# Altium PCB Heart-by-LED.PcbDoc
Units mm, origin at the board's own origin, x right, y up, seen from the top; angles counter-clockwise.
Board outline 98 x 98 mm, 4 copper layers (Top Copper, Signal Layer 1, Signal Layer 2, Bottom Copper), stack 0.77 mm thick; 128 components, 108 nets, 411 pads, 0 vias.
Unrouted connection lines stored in the file: 271.
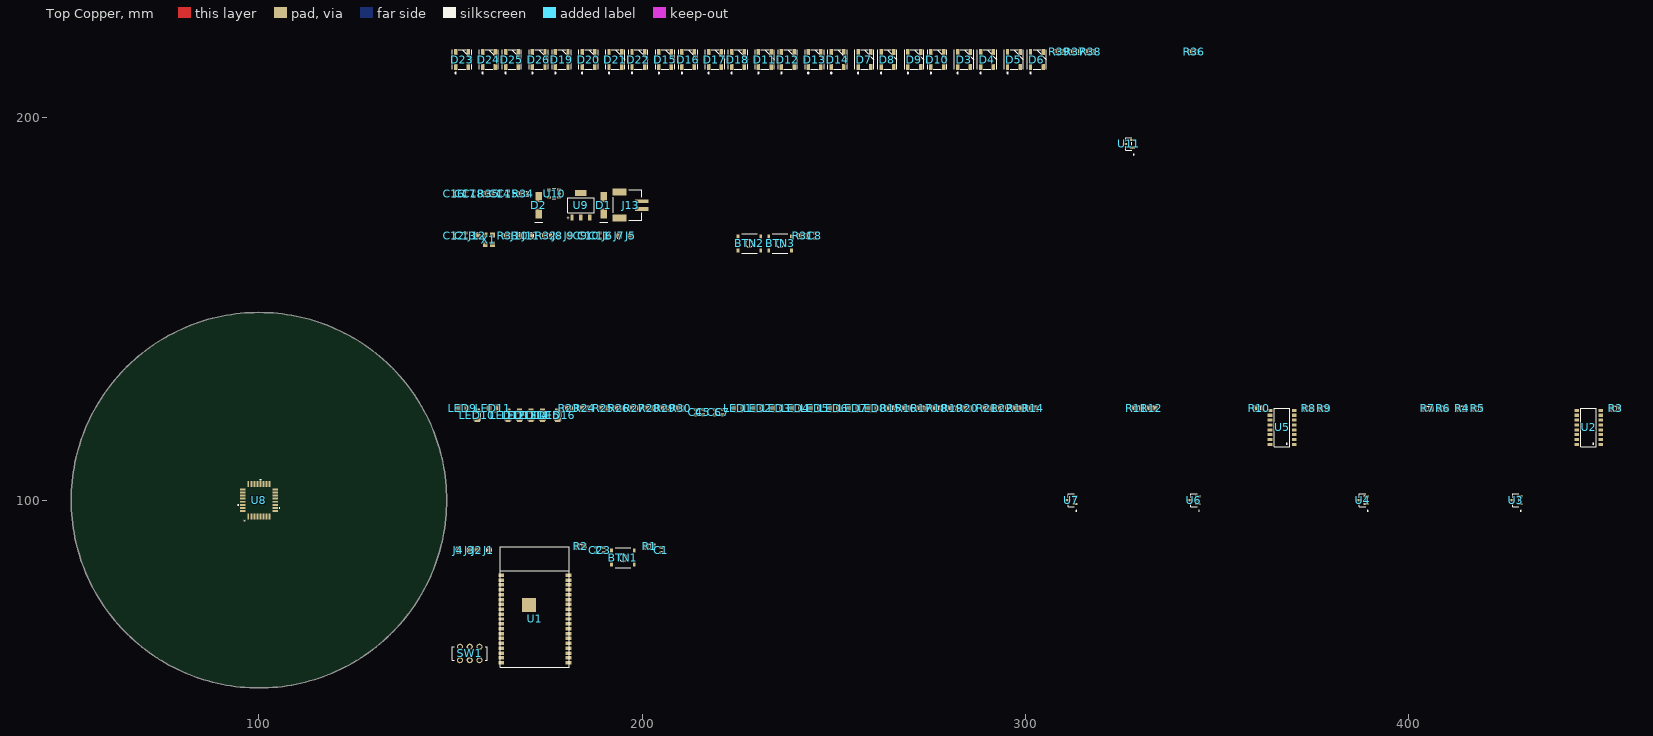
[diagram p0: Top Copper view]
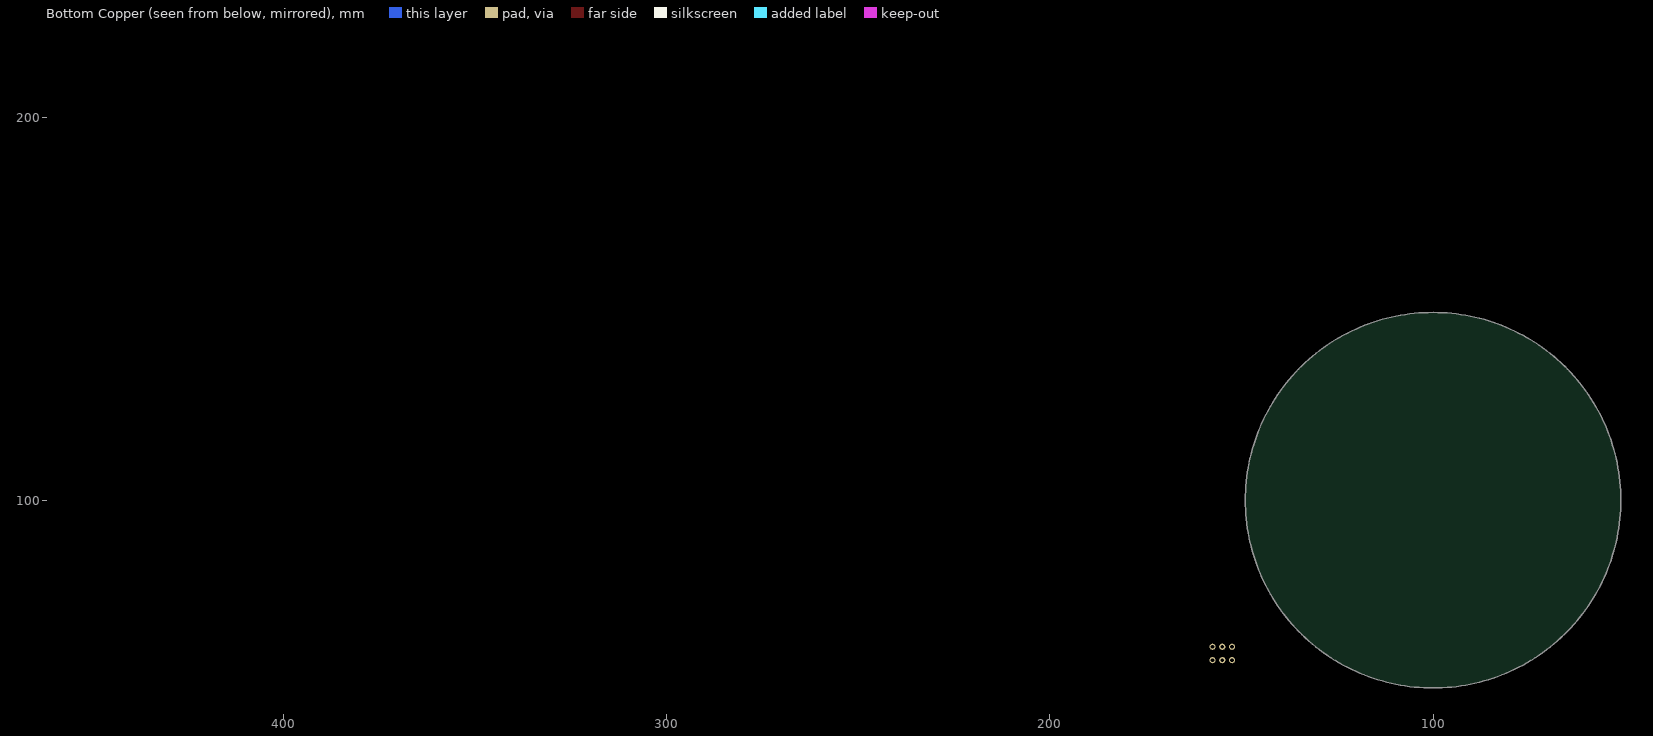
[diagram p1: Bottom Copper view, seen from below]

## Layer stack, top to bottom
Top Mask: solder mask 0.015, Solder Resist, Dk 3.8
Top Copper: signal copper 0.035
Dielectric 1: prepreg 0.2, 7628, Dk 4.6
Signal Layer 1: signal copper 0.0175
Core: core 0.265, FR-4, Dk 4.5
Signal Layer 2: signal copper 0.0175
Dielectric 2: prepreg 0.2, 7628, Dk 4.6
Bottom Copper: signal copper 0.035
Bottom Mask: solder mask 0.015, Solder Resist, Dk 3.8

## Board outline
100,51 cw(c100,100) 51,100 cw(c100,100) 100,149 cw(c100,100) 149,100 cw(c100,100)

## Design rules (kind name [scope] priority, off if disabled: settings)
Clearance [All] p1: gap=0.254 ignorepadtopadclearanceinfootprint=FALSE except(0: Arc-Hole Track-Hole SMDPad-Hole THPad-Hole Via-Hole Fill-Hole Poly-Hole Region-Hole Text-Hole)
PolygonConnect [All] p1: connectstyle=Relief reliefconductorwidth=0.254 reliefentries=4 polygonreliefangle="90 Angle" airgapwidth=0.254
RoutingVias [All] p1: holewidth=0.711 width=1.27 viastyle="Through Hole" minholewidth=0.711 minwidth=1.27 maxholewidth=0.711 maxwidth=1.27
SolderMaskExpansion [All] p1: expansion=0.102
Width [All] p1: maxlimit=0.254 minlimit=0.254 preferedwidth=0.254
30 further rules are at their usual default settings.

## Classes and differential pairs
component class Power: C14 C15 C16 C17 C18 D1 D2 J13 R34 R35 SW1 U9 U10
component class WS2812B: D3 D4 D5 D6 D7 D8 D9 D10 D11 D12 D13 D14 D15 D16 D17 D18 D19 D20 D21 D22 D23 D24 D25 D26 R36 R37 R38 R39 U11
component class MCU: BTN2 BTN3 C8 C9 C10 C11 C12 C13 J5 J6 J7 J8 J9 J10 J11 J12 R31 R32 R33 U8 X1
component class LEDs: C4 C5 C6 C7 LED1 LED2 LED3 LED4 LED5 LED6 LED7 LED8 LED9 LED10 LED11 LED12 LED13 LED14 LED15 LED16 R3 R4 R5 R6 R7 R8 R9 R10 R11 R12 R13 R14 R15 R16 R17 R18 R19 R20 R21 R22 R23 R24 R25 R26 R27 R28 R29 R30 U2 U3 U4 U5 U6 U7
component class ESP32: BTN1 C1 C2 C3 J1 J2 J3 J4 R1 R2 U1

## Components (designator, comment, footprint, x,y, rotation, side; value= is the part's Value field where it differs from the comment)
BTN1 "Button" TactileButton_4x4 195,85 r0 top
BTN2 "Button" TactileButton_4x4 228,167 r0 top
BTN3 "Button" TactileButton_4x4 236,167 r0 top
C1 "Cap Semi" 1608[0603] 205,87 r90 top value=100nF
C2 "Cap Semi" 1608[0603] 188,87 r90 top value=100nF
C3 "Cap Semi" 1608[0603] 190,87 r90 top value=1uF
C4 "Cap Semi" 1608[0603] 214,123 r90 top value=100nF
C5 "Cap Semi" 1608[0603] 216,123 r90 top value=100nF
C6 "Cap Semi" 1608[0603] 219,123 r90 top value=1uF
C7 "Cap Semi" 1608[0603] 221,123 r90 top value=1uF
C8 "Cap Semi" 1608[0603] 245,169 r90 top value=100nF
C9 "Cap Semi" 1608[0603] 184,169 r90 top value=100nF
C10 "Cap Semi" 1608[0603] 186,169 r90 top value=1uF
C11 "Cap Semi" 1608[0603] 189,169 r90 top value=100nF
C12 "Cap Semi" 1608[0603] 151,169 r90 top value=22pF
C13 "Cap Semi" 1608[0603] 154,169 r90 top value=22pF
C14 "Cap Semi" 1608[0603] 163,180 r90 top value=1uF
C15 "Cap Semi" 1608[0603] 165,180 r90 top value=100nF
C16 "Cap Semi" 1608[0603] 151,180 r90 top value=1uF
C17 "Cap Semi" 1608[0603] 154,180 r90 top value=22pF
C18 "Cap Semi" 1608[0603] 156,180 r90 top value=100nF
D1 "Diode Schottky" DO-214AC 190,177 r90 top value="SS54 SMA"
D2 "Diode Schottky" DO-214AC 173,177 r90 top value="SS54 SMA"
D3 "RGB LED" WS2812B 284,215 r90 top value=WS2812B
D4 "RGB LED" WS2812B 290,215 r90 top value=WS2812B
D5 "RGB LED" WS2812B 297,215 r90 top value=WS2812B
D6 "RGB LED" WS2812B 303,215 r90 top value=WS2812B
D7 "RGB LED" WS2812B 258,215 r90 top value=WS2812B
D8 "RGB LED" WS2812B 264,215 r90 top value=WS2812B
D9 "RGB LED" WS2812B 271,215 r90 top value=WS2812B
D10 "RGB LED" WS2812B 277,215 r90 top value=WS2812B
D11 "RGB LED" WS2812B 232,215 r90 top value=WS2812B
D12 "RGB LED" WS2812B 238,215 r90 top value=WS2812B
D13 "RGB LED" WS2812B 245,215 r90 top value=WS2812B
D14 "RGB LED" WS2812B 251,215 r90 top value=WS2812B
D15 "RGB LED" WS2812B 206,215 r90 top value=WS2812B
D16 "RGB LED" WS2812B 212,215 r90 top value=WS2812B
D17 "RGB LED" WS2812B 219,215 r90 top value=WS2812B
D18 "RGB LED" WS2812B 225,215 r90 top value=WS2812B
D19 "RGB LED" WS2812B 179,215 r90 top value=WS2812B
D20 "RGB LED" WS2812B 186,215 r90 top value=WS2812B
D21 "RGB LED" WS2812B 193,215 r90 top value=WS2812B
D22 "RGB LED" WS2812B 199,215 r90 top value=WS2812B
D23 "RGB LED" WS2812B 153,215 r90 top value=WS2812B
D24 "RGB LED" WS2812B 160,215 r90 top value=WS2812B
D25 "RGB LED" WS2812B 166,215 r90 top value=WS2812B
D26 "RGB LED" WS2812B 173,215 r90 top value=WS2812B
J1 "TestPin" TestPin_1mm 160,87 r90 top
J2 "TestPin" TestPin_1mm 157,87 r90 top
J3 "TestPin" TestPin_1mm 155,87 r90 top
J4 "TestPin" TestPin_1mm 152,87 r90 top
J5 "TestPin" TestPin_1mm 197,169 r90 top
J6 "TestPin" TestPin_1mm 191,169 r90 top
J7 "TestPin" TestPin_1mm 194,169 r90 top
J8 "TestPin" TestPin_1mm 178,169 r90 top
J9 "TestPin" TestPin_1mm 181,169 r90 top
J10 "TestPin" TestPin_1mm 168,169 r90 top
J11 "TestPin" TestPin_1mm 171,169 r90 top
J12 "TestPin" TestPin_1mm 157,169 r90 top
J13 "PH2.0 Female" "PH2.0 FEMALE" 197,177 r90 top
LED1 "LED" LED-0805-Red 224,124 r0 top value="LED 3 - 5 ly 2 Colour"
LED2 "LED" LED-0805-Red 229,124 r0 top value="LED 3 - 5 ly 2 Colour"
LED3 "LED" LED-0805-Red 234,124 r0 top value="LED 3 - 5 ly 2 Colour"
LED4 "LED" LED-0805-Red 239,124 r0 top value="LED 3 - 5 ly 2 Colour"
LED5 "LED" LED-0805-Red 244,124 r0 top value="LED 3 - 5 ly 2 Colour"
LED6 "LED" LED-0805-Red 249,124 r0 top value="LED 3 - 5 ly 2 Colour"
LED7 "LED" LED-0805-Red 254,124 r0 top value="LED 3 - 5 ly 2 Colour"
LED8 "LED" LED-0805-Red 259,124 r0 top value="LED 3 - 5 ly 2 Colour"
LED9 "LED" LED-0805-Red 152,124 r0 top value="LED 3 - 5 ly 2 Colour"
LED10 "LED" LED-0805-Red 157,121 r90 top value="LED 3 - 5 ly 2 Colour"
LED11 "LED" LED-0805-Red 160,124 r0 top value="LED 3 - 5 ly 2 Colour"
LED12 "LED" LED-0805-Red 165,121 r90 top value="LED 3 - 5 ly 2 Colour"
LED13 "LED" LED-0805-Red 168,121 r90 top value="LED 3 - 5 ly 2 Colour"
LED14 "LED" LED-0805-Red 171,121 r90 top value="LED 3 - 5 ly 2 Colour"
LED15 "LED" LED-0805-Red 174,121 r90 top value="LED 3 - 5 ly 2 Colour"
LED16 "LED" LED-0805-Red 178,121 r90 top value="LED 3 - 5 ly 2 Colour"
R1 "Res" RES-SMD-0603 202,88 r0 top value=0R
R2 "Res" RES-SMD-0603 184,88 r0 top value=0R
R3 "Res" RES-SMD-0603 454,124 r0 top value=0R
R4 "Res" RES-SMD-0603 414,124 r0 top value=10k
R5 "Res" RES-SMD-0603 418,124 r0 top value=10k
R6 "Res" RES-SMD-0603 409,124 r0 top value=0R
R7 "Res" RES-SMD-0603 405,124 r0 top value=0R
R8 "Res" RES-SMD-0603 374,124 r0 top value=10k
R9 "Res" RES-SMD-0603 378,124 r0 top value=10k
R10 "Res" RES-SMD-0603 361,124 r0 top value=0R
R11 "Res" RES-SMD-0603 329,124 r0 top value=10k
R12 "Res" RES-SMD-0603 333,124 r0 top value=10k
R13 "Res" RES-SMD-0603 298,124 r0 top value=10k
R14 "Res" RES-SMD-0603 302,124 r0 top value=10k
R15 "Res" RES-SMD-0603 265,124 r0 top value=10k
R16 "Res" RES-SMD-0603 269,124 r0 top value=10k
R17 "Res" RES-SMD-0603 273,124 r0 top value=10k
R18 "Res" RES-SMD-0603 277,124 r0 top value=10k
R19 "Res" RES-SMD-0603 281,124 r0 top value=10k
R20 "Res" RES-SMD-0603 285,124 r0 top value=10k
R21 "Res" RES-SMD-0603 290,124 r0 top value=10k
R22 "Res" RES-SMD-0603 294,124 r0 top value=10k
R23 "Res" RES-SMD-0603 181,124 r0 top value=10k
R24 "Res" RES-SMD-0603 185,124 r0 top value=10k
R25 "Res" RES-SMD-0603 190,124 r0 top value=10k
R26 "Res" RES-SMD-0603 194,124 r0 top value=10k
R27 "Res" RES-SMD-0603 198,124 r0 top value=10k
R28 "Res" RES-SMD-0603 202,124 r0 top value=10k
R29 "Res" RES-SMD-0603 206,124 r0 top value=10k
R30 "Res" RES-SMD-0603 210,124 r0 top value=10k
R31 "Res" RES-SMD-0603 242,169 r0 top value=10k
R32 "Res" RES-SMD-0603 175,169 r0 top value=1k
R33 "Res" RES-SMD-0603 165,169 r0 top value=1k
R34 "Res" RES-SMD-0603 169,180 r0 top value=0R
R35 "Res" RES-SMD-0603 160,180 r0 top value=100k
R36 "Res" RES-SMD-0603 344,217 r0 top value=0R
R37 "Res" RES-SMD-0603 313,217 r0 top value=10k
R38 "Res" RES-SMD-0603 317,217 r0 top value=10k
R39 "Res" RES-SMD-0603 309,217 r0 top value=0R
SW1 "Switch" MSS-22D18 155,60 r0 top
U1 "ESP32 Module" ESP32-WROVER-IB 172,69 r0 top value=ESP32-WROVER-IB
U2 "Shift Register" SO16 447,119 r90 top value=74HC595D
U3 "BSS138LT1G" SOT23-3_ONS 428,100 r90 top
U4 "BSS138LT1G" SOT23-3_ONS 388,100 r90 top
U5 "Shift Register" SO16 367,119 r90 top value=74HC595D
U6 "BSS138LT1G" SOT23-3_ONS 344,100 r90 top
U7 "BSS138LT1G" SOT23-3_ONS 312,100 r90 top
U8 "ATMEGA328P-AU" 32A_ATM 100,100 r90 top locked
U9 "lm1117mpx-5_0" LM1117 184,177 r90 top value=Value
U10 "LDO 3.3V" SOT-23-5 177,180 r90 top
U11 "BSS138LT1G" SOT23-3_ONS 327,193 r90 top
X1 "Crystal" SMD-3225-4P 160,168 r90 top value=16MHz

## Footprints (in the part's own frame and the unit in brackets; to place one, negate y for a bottom-side part, rotate by r counter-clockwise, add the part's x,y. Pads: shape width x height; smd on the part's side, far side on the other; paste and mask are expansions set on the pad)
32A_ATM [mil]
  rect 58x20 smd paste+0 mask+0: 1(-167,110.24) 2(-167,78.74) 3(-167,47.24) 4(-167,15.75) 5(-167,-15.75) 6(-167,-47.24) 7(-167,-78.74) 8(-167,-110.24) 17(167,-110.24) 18(167,-78.74) 19(167,-47.24) 20(167,-15.75) 21(167,15.75) 22(167,47.24) 23(167,78.74) 24(167,110.24)
  rect 20x58 smd paste+0 mask+0: 9(-110.24,-167) 10(-78.74,-167) 11(-47.24,-167) 12(-15.75,-167) 13(15.75,-167) 14(47.24,-167) 15(78.74,-167) 16(110.24,-167) 25(110.24,167) 26(78.74,167) 27(47.24,167) 28(15.75,167) 29(-15.75,167) 30(-47.24,167) 31(-78.74,167) 32(-110.24,167)
  silkscreen extent -86,-216 216,216, body extent -182,-182 182,182, height 47
1608[0603] [mm] "Chip Capacitor, Body 1.6x0.8mm, IPC High Density"
  rect 0.8x0.9 smd: 1(-0.7,0) 2(0.7,0)
  body extent -0.87,-0.48 0.87,0.48, height 1.3
DO-214AC [mm]
  rect 2.65x1.75 smd: 1(-2.15,0) 2(2.15,0)
  silkscreen extent -4.5,-1 -4.5,1, body extent -2.6,-1.3 2.6,1.3, height 2.4
ESP32-WROVER-IB [mm] "Multiprotocol Modules SMD Module M213DH3264UH3Q0, ESP32-D0WD, 64Mbits PSRAM, 4 MB SPI flash, IPEX Antenna connector"
  rect 1.5x0.9 smd: 1(-8.75,11.43) 2(-8.75,10.16) 3(-8.75,8.89) 4(-8.75,7.62) 5(-8.75,6.35) 6(-8.75,5.08) 7(-8.75,3.81) 8(-8.75,2.54) 9(-8.75,1.27) 10(-8.75,0) 11(-8.75,-1.27) 12(-8.75,-2.54) 13(-8.75,-3.81) 14(-8.75,-5.08) 15(-8.75,-6.35) 16(-8.75,-7.62) 17(-8.75,-8.89) 18(-8.75,-10.16) 19(-8.75,-11.43) 20(8.75,-11.43) 21(8.75,-10.16) 22(8.75,-8.89) 23(8.75,-7.62) 24(8.75,-6.35) 25(8.75,-5.08) 26(8.75,-3.81) 27(8.75,-2.54) 28(8.75,-1.27) 29(8.75,0) 30(8.75,1.27) 31(8.75,2.54) 32(8.75,3.81) 33(8.75,5.08) 34(8.75,6.35) 35(8.75,7.62) 36(8.75,8.89) 37(8.75,10.16) 38(8.75,11.43)
  rect 3.7x3.7 smd: 39(-1.5,3.63)
  silkscreen extent -9,-12.53 9,18.87
LED-0805-Red [mil]
  rect 50x55 smd: 1(0,0) 2(90,0)
  silkscreen extent 0,-35 90,35, body extent 5,-25 85,25, height 43
LM1117 [mil]
  rect 62.56x33.36 smd paste+0 mask+0: 1(-126,90.55) 2(-126,0) 3(-126,-90.55)
  rect 62.56x120.43 smd paste+0 mask+0: 4(126,0)
  silkscreen extent -78,-137 78,137, body extent -144,-132 144,132, height 71
MSS-22D18 [mm]
  round 1.6 hole 1: 1(-2.54,1.75) 2(0,1.75) 3(2.54,1.75) 4(-2.54,-1.75) 5(0,-1.75) 6(2.54,-1.75)
  silkscreen extent -4.55,-1.75 4.55,1.75
"PH2.0 FEMALE" [mm]
  rect 1x3.5 smd: 1(1,-2.876) 2(-1,-2.876)
  rect 1.8x3.6 smd: 3(-3.4,2.876) 4(3.4,2.876)
  silkscreen extent -4,-2.88 4,4.5
RES-SMD-0603 [mm]
  rect 0.6x0.9 smd: 1(-0.889,0) 2(0.927,0)
  silkscreen extent -1.4,-0.64 1.4,0.64, body extent -0.8,-0.4 0.8,0.4, height 0.43
SMD-3225-4P [mm]
  rect 1.4x1.2 smd: 1(-1.2,-0.95) 2(1.2,-0.95) 3(1.2,0.95) 4(-1.2,0.95)
  body extent -1.6,-1.25 1.6,1.25, height 0.81
SO16 [mm]
  rect 0.8x1.2 smd: 1(-4.445,-3.15) 2(-3.175,-3.15) 3(-1.905,-3.15) 4(-0.635,-3.15) 5(0.635,-3.15) 6(1.905,-3.15) 7(3.175,-3.15) 8(4.445,-3.15) 9(4.445,3.15) 10(3.175,3.15) 11(1.905,3.15) 12(0.635,3.15) 13(-0.635,3.15) 14(-1.905,3.15) 15(-3.175,3.15) 16(-4.445,3.15)
  silkscreen extent -5,-2 5,2, body extent -4.98,-3.07 4.99,3.07, height 1.73
SOT23-3_ONS [mil]
  rect 22x55 smd paste+0 mask+0: 1(-40,-38.5) 2(40,-38.5) 3(0,38.5)
  silkscreen extent -115,-57 65,33, body extent -60,-52 60,52, height 44
SOT-23-5 [mm]
  rect 0.7x1 smd: 1(-0.95,-1.3) 2(0,-1.3) 3(0.95,-1.3) 4(0.95,1.3) 5(-0.95,1.3)
  silkscreen extent -1.35,-0.5 1.35,0.5, body extent -1.5,-1.25 1.5,1.25, height 1.05
TactileButton_4x4 [mm] "Tactile Button 4mm x 4mm H=1.5mm SMD 4-Pin"
  rect 0.75x1.05 smd: 1(-2.95,1.825) 2(-2.95,-1.825) 3(2.95,-1.825) 4(2.95,1.825)
  silkscreen extent -2,-2.6 2,2.6
TestPin_1mm [mm]
  round 1 smd: 1(0,0)
  silkscreen extent -0.74,-0.74 0.74,0.74
WS2812B [mm] "RGB 620~630nm Red, 515~530nm Green, 465~475nm Blue SMD,5x5mm Light Emitting Diodes (LED) ROHS"
  rect 1.5x0.9 smd: 1(-1.95,1.65) 2(-1.95,-1.65) 3(1.95,-1.65) 4(1.95,1.65)
  silkscreen extent -3.7,-2.5 2.5,2.5

## Part data
BTN1 BTN2 BTN3: library part Tactile_4x4
C1 C2 C3 C4 C5 C6 C7 C8 C9 C10 C11 C12 C13 C14 C15 C16 C17 C18: "Capacitor (Semiconductor SIM Model)", LatestRevisionDate=29-May-2009, LatestRevisionNote="IPC-7351 Footprint Added.", PackageDescription="Chip Capacitor", PackageReference=C1206, Published=8-Jun-2000, Publisher="Altium Limited"
D1 D2: library part "SS54 SMA", "Diode Shotky SS54 5A 40V"
D3 D4 D5 D6 D7 D8 D9 D10 D11 D12 D13 D14 D15 D16 D17 D18 D19 D20 D21 D22 D23 D24 D25 D26: library part WS2812B, "RGB 620~630nm Red, 515~530nm Green, 465~475nm Blue SMD,5x5mm Light Emitting Diodes (LED) ROHS", Manufacturer=Worldsemi
J1 J2 J3 J4 J5 J6 J7 J8 J9 J10 J11 J12: library part TestPin_1mm, "Test conntact for pogo pins"
J13: library part PH2.0, "2 Header PH 0.079\"(2.00mm) Male Pin SMD,P=2mm Wire To Board / Wire To Wire Connector ROHS"
LED1 LED2 LED3 LED4 LED5 LED6 LED7 LED8 LED9 LED10 LED11 LED12 LED13 LED14 LED15 LED16: library part "LED SMD"
R1 R2 R3 R4 R5 R6 R7 R8 R9 R10 R11 R12 R13 R14 R15 R16 R17 R18 R19 R20 R21 R22 R23 R24 R25 R26 R27 R28 R29 R30 R31 R32 R33 R34 R35 R36 R37 R38 R39: library part Res-SMD, "Resistor", Manufacturer="Generic Components", Class=Passive, Published=08/06/2000, Publisher="Altium Hobart Technology Centre"
SW1: library part MSS-22D18, "Plugin,9.1x3.5mm Slide Switches ROHS"
U1: library part ESP32-WROVER-IB, "Multiprotocol Modules SMD Module M213DH3264UH3Q0, ESP32-D0WD, 64Mbits PSRAM, 4 MB SPI flash, IPEX Antenna connector", Manufacturer="Espressif Systems"
U2 U5: library part 74HC595, "74HC Shift Register SOIC-16_150mil Registers ROHS"
U3 U4 U6 U7 U8 U9 U11: "No Description Available", Copyright="Copyright (C) 2018 Accelerated Designs. All rights reserved", RefDes=RefDes, Type=DEV
  U3 U4 U6 U7 U11: Built_By=EMA_Jessica, Manufacturer_Part_Number=BSS138LT1G, SourceLibrary=ON_Semiconductor_2019-12-30, Vendor="ON Semiconductor"
  U8: Built_By=EMA_UL_Team, Manufacturer_Part_Number=ATMEGA328P-AU, SourceLibrary=Atmel_2011-04-02, Vendor=Atmel
  U9: Built_By=EMA_UL_Team, Manufacturer_Part_Number=lm1117mpx-5_0, Vendor="Texas Instruments"
U10: library part RT9193-33GB, "300mA Fixed 3.3V SOT-23-5 Linear Voltage Regulators (LDO) ROHS"
X1: library part "Crystal 3225", "16MHz ±25ppm SMD3225-4P Oscillators ROHS"

## Nets (pads, with @x,y where several pads share a name; then routed paths per layer and width w, separated by ;. In a path a pad name is that pad's centre, name@x,y a point inside that pad or via, vN(x,y) a via of type N, cw(c..) or ccw(c..) an arc to the next point about the centre after c; other vN are vias at no path point)
+3.3: C2.2 C3.2 C18.2 R5.1 R9.1 R12.1 R14.1 R38.1 U1.2 U3.1 U4.1 U6.1 U7.1 U10.5 U11.1
AD0: U8.23
AD1: U8.24
AD2: U8.25
AD3: U8.26
AD4: R1.2 U8.27
AD5: R2.2 U8.28
AD6: U8.19
AD7: U8.22
ESP_BOOT: J2.1 U1.25
ESP_EN: BTN1.1 C1.2 J1.1 U1.3
ESP_IO12: R5.2 U1.14 U3.2
ESP_IO14: R9.2 U1.13 U4.2
ESP_IO15: R38.2 U1.23 U11.2
ESP_IO22: R1.1 U1.36
ESP_IO23: R2.1 U1.37
ESP_IO26: R12.2 U1.11 U6.2
ESP_IO27: R14.2 U1.12 U7.2
ESP_LED_CTRL: R37.2 R39.2 U11.3
ESP_RXD: J4.1 U1.34
ESP_TXD: J3.1 U1.35
GND: BTN1.3 BTN2.3 BTN3.3 C1.1 C2.1 C3.1 C4.2 C5.2 C6.2 C7.2 C8.1 C9.1 C10.1 C11.1 C12.1 C13.1 C14.1 C15.1 C16.1 C17.1 C18.1 D3.3 D4.3 D5.3 D6.3 D7.3 D8.3 D9.3 D10.3 D11.3 D12.3 D13.3 D14.3 D15.3 D16.3 D17.3 D18.3 D19.3 D20.3 D21.3 D22.3 D23.3 D24.3 D25.3 D26.3 J12.1 J13.3 J13.4 R35.2 SW1.5 U1.1 U1.15 U1.38 U1.39 U2.8 U2.13 U5.8 U5.13 U8.3 U8.5 U8.21 U9.1 U9.4 U10.2 X1.2 X1.4
IO0: R32.2 U8.30
IO1: R33.2 U8.31
IO2: BTN3.1 C8.2 U8.32
IO3: U8.1
IO4: R36.2 U8.2
IO5: R6.2 U8.9
IO6: R7.2 U8.10
IO7: R3.2 U8.11
IO8: R10.2 U8.12
IO9: R34.2 U8.13
IO10: U8.14
IO11: J7.1 U8.15
IO12: J9.1 U8.16
IO13: J11.1 U8.17
LED0: LED1.2 U2.15
LED1: LED2.2 U2.1
LED2: LED3.2 U2.2
LED3: LED4.2 U2.3
LED4: LED5.2 U2.4
LED5: LED6.2 U2.5
LED6: LED7.2 U2.6
LED7: LED8.2 U2.7
LED8: LED9.2 U5.15
LED9: LED10.2 U5.1
LED10: LED11.2 U5.2
LED11: LED12.2 U5.3
LED12: LED13.2 U5.4
LED13: LED14.2 U5.5
LED14: LED15.2 U5.6
LED15: LED16.2 U5.7
LED_DIN_1: D6.4 R36.1 R39.1
LED_DIN_2: D3.2 D10.4
LED_DIN_3: D7.2 D14.4
LED_DIN_4: D11.2 D18.4
LED_DIN_5: C4.1 C5.1 C6.1 C7.1 C9.2 C10.2 C16.2 D2.1 D3.1 D4.1 D5.1 D6.1 D7.1 D8.1 D9.1 D10.1 D11.1 D12.1 D13.1 D14.1 D15.1 D15.2 D15.4 D16.1 D16.2 D16.4 D17.1 D17.2 D17.4 D18.1 D18.2 D19.1 D20.1 D21.1 D22.1 D22.4 D23.1 D24.1 D25.1 D26.1 J5.1 R4.1 R8.1 R11.1 R13.1 R15.1 R16.1 R17.1 R18.1 R19.1 R20.1 R21.1 R22.1 R23.1 R24.1 R25.1 R26.1 R27.1 R28.1 R29.1 R30.1 R31.1 R37.1 U2.16 U5.16 U8.4 U8.6 U8.18 U10.1
LED_DIN_6: D19.2 D26.4
LED_DOUT: D23.2
MCU_AREF: C11.2 U8.20
MCU_RST: BTN2.1 J6.1 R31.2 U8.29
NetC15_2: C15.2 D2.2 U9.2
NetC17_2: C17.2 U10.4
NetD1_1: D1.1 SW1.1
NetD1_2: D1.2 J13.2
NetD3_4: D3.4 D4.2
NetD4_4: D4.4 D5.2
NetD5_4: D5.4 D6.2
NetD7_4: D7.4 D8.2
NetD8_4: D8.4 D9.2
NetD9_4: D9.4 D10.2
NetD11_4: D11.4 D12.2
NetD12_4: D12.4 D13.2
NetD13_4: D13.4 D14.2
NetD19_4: D19.4 D20.2
NetD20_4: D20.4 D21.2
NetD21_4: D21.4 D22.2
NetD23_4: D23.4 D24.2
NetD24_4: D24.4 D25.2
NetD25_4: D25.4 D26.2
NetJ13_1: J13.1 SW1.4
NetLED1_1: LED1.1 R15.2
NetLED2_1: LED2.1 R16.2
NetLED3_1: LED3.1 R17.2
NetLED4_1: LED4.1 R18.2
NetLED5_1: LED5.1 R19.2
NetLED6_1: LED6.1 R20.2
NetLED7_1: LED7.1 R21.2
NetLED8_1: LED8.1 R22.2
NetLED9_1: LED9.1 R23.2
NetLED10_1: LED10.1 R24.2
NetLED11_1: LED11.1 R25.2
NetLED12_1: LED12.1 R26.2
NetLED13_1: LED13.1 R27.2
NetLED14_1: LED14.1 R28.2
NetLED15_1: LED15.1 R29.2
NetLED16_1: LED16.1 R30.2
NetR34_1: R34.1 R35.1 U10.3
NetU2_9: U2.9 U5.14
PWR_IN: C14.2 SW1.2 U9.3
RXD: J8.1 R32.1
SR_DS: R3.1 R4.2 U2.14 U3.3
SR_MR: R10.1 R13.2 U2.10 U5.10 U7.3
SR_SHCP: R7.1 R11.2 U2.11 U5.11 U6.3
SR_STCP: R6.1 R8.2 U2.12 U4.3 U5.12
TXD: J10.1 R33.1
XTAL1: C12.2 U8.7 X1.1
XTAL2: C13.2 U8.8 X1.3
pads on no net: BTN1.2 BTN1.4 BTN2.2 BTN2.4 BTN3.2 BTN3.4 SW1.3 SW1.6 U1.4 U1.5 U1.6 U1.7 U1.8 U1.9 U1.10 U1.16 U1.17 U1.18 U1.19 U1.20 U1.21 U1.22 U1.24 U1.26 U1.27 U1.28 U1.29 U1.30 U1.31 U1.32 U1.33 U5.9

## Text inside footprints (layer, text, board x,y; h text height)
U1: Mechanical 1 "ANTENNA" at 163,81.65 h3
U3: Mechanical 7 "0.055in/1.397mm" at 428.318,90.666 h0.64 r90; Mechanical 7 "0.12in/3.048mm" at 421.091,97.778 h0.64 r90; Mechanical 7 "0.02in/0.508mm" at 423.631,97.778 h0.64 r90; Mechanical 7 "0.08in/2.032mm" at 433.004,97.778 h0.64 r90; Mechanical 7 "0.027in/0.686mm" at 427.34,103.937 h0.64 r90; Mechanical 7 "0.104in/2.642mm" at 428.318,105.842 h0.64 r90; Mechanical 7 "Alt 2 Padstyle: OX90Y60D30P" at 441.742,91.428 h1.27 r90; Mechanical 7 "Alt 1 Padstyle: OX60Y90D30P" at 439.837,91.428 h1.27 r90; Mechanical 7 "Bottom Padstyle: RX22Y55D0T" at 437.932,91.428 h1.27 r90; Mechanical 7 "Top Padstyle: RX22Y55D0T" at 436.027,92.38 h1.27 r90
U4: Mechanical 7 "0.055in/1.397mm" at 388.318,90.666 h0.64 r90; Mechanical 7 "0.12in/3.048mm" at 381.091,97.778 h0.64 r90; Mechanical 7 "0.02in/0.508mm" at 383.631,97.778 h0.64 r90; Mechanical 7 "0.08in/2.032mm" at 393.004,97.778 h0.64 r90; Mechanical 7 "0.027in/0.686mm" at 387.34,103.937 h0.64 r90; Mechanical 7 "0.104in/2.642mm" at 388.318,105.842 h0.64 r90; Mechanical 7 "Alt 2 Padstyle: OX90Y60D30P" at 401.742,91.428 h1.27 r90; Mechanical 7 "Alt 1 Padstyle: OX60Y90D30P" at 399.837,91.428 h1.27 r90; Mechanical 7 "Bottom Padstyle: RX22Y55D0T" at 397.932,91.428 h1.27 r90; Mechanical 7 "Top Padstyle: RX22Y55D0T" at 396.027,92.38 h1.27 r90
U6: Mechanical 7 "0.055in/1.397mm" at 344.318,90.666 h0.64 r90; Mechanical 7 "0.12in/3.048mm" at 337.091,97.778 h0.64 r90; Mechanical 7 "0.02in/0.508mm" at 339.631,97.778 h0.64 r90; Mechanical 7 "0.08in/2.032mm" at 349.004,97.778 h0.64 r90; Mechanical 7 "0.027in/0.686mm" at 343.34,103.937 h0.64 r90; Mechanical 7 "0.104in/2.642mm" at 344.318,105.842 h0.64 r90; Mechanical 7 "Alt 2 Padstyle: OX90Y60D30P" at 357.742,91.428 h1.27 r90; Mechanical 7 "Alt 1 Padstyle: OX60Y90D30P" at 355.837,91.428 h1.27 r90; Mechanical 7 "Bottom Padstyle: RX22Y55D0T" at 353.932,91.428 h1.27 r90; Mechanical 7 "Top Padstyle: RX22Y55D0T" at 352.027,92.38 h1.27 r90
U7: Mechanical 7 "0.055in/1.397mm" at 312.318,90.666 h0.64 r90; Mechanical 7 "0.12in/3.048mm" at 305.091,97.778 h0.64 r90; Mechanical 7 "0.02in/0.508mm" at 307.631,97.778 h0.64 r90; Mechanical 7 "0.08in/2.032mm" at 317.004,97.778 h0.64 r90; Mechanical 7 "0.027in/0.686mm" at 311.34,103.937 h0.64 r90; Mechanical 7 "0.104in/2.642mm" at 312.318,105.842 h0.64 r90; Mechanical 7 "Alt 2 Padstyle: OX90Y60D30P" at 325.742,91.428 h1.27 r90; Mechanical 7 "Alt 1 Padstyle: OX60Y90D30P" at 323.837,91.428 h1.27 r90; Mechanical 7 "Bottom Padstyle: RX22Y55D0T" at 321.932,91.428 h1.27 r90; Mechanical 7 "Top Padstyle: RX22Y55D0T" at 320.027,92.38 h1.27 r90
U8: Top Overlay "*" at 97.054,94.069 h1.27 r90; Mechanical 7 "Default Horiz Padstyle: RX20Y58D0T" at 111.608,89.205 h1.27 r90; Mechanical 7 "Default Vert Padstyle: RX20Y58D0T" at 112.878,89.523 h1.27 r90; Mechanical 7 "0.031in/0.8mm" at 97.918,107.671 h0.64 r90; Mechanical 7 "0.03in/0.762mm" at 92.329,102.019 h0.64 r90; Mechanical 7 "0.364in/9.246mm" at 90.424,97.619 h0.64 r90; Mechanical 7 "0.364in/9.246mm" at 100.318,109.576 h0.64 r90; Mechanical 7 "0.276in/7.01mm" at 108.306,97.778 h0.64 r90; Mechanical 7 "0.276in/7.01mm" at 100.318,87.884 h0.64 r90; Mechanical 13 "*" at 97.816,96.685 h1.27 r90
U9: Top Overlay "*" at 181.53,173.228 h1.27 r90
U11: Mechanical 7 "0.055in/1.397mm" at 327.318,183.666 h0.64 r90; Mechanical 7 "0.12in/3.048mm" at 320.091,190.778 h0.64 r90; Mechanical 7 "0.02in/0.508mm" at 322.631,190.778 h0.64 r90; Mechanical 7 "0.08in/2.032mm" at 332.004,190.778 h0.64 r90; Mechanical 7 "0.027in/0.686mm" at 326.34,196.937 h0.64 r90; Mechanical 7 "0.104in/2.642mm" at 327.318,198.842 h0.64 r90; Mechanical 7 "Alt 2 Padstyle: OX90Y60D30P" at 340.742,184.428 h1.27 r90; Mechanical 7 "Alt 1 Padstyle: OX60Y90D30P" at 338.837,184.428 h1.27 r90; Mechanical 7 "Bottom Padstyle: RX22Y55D0T" at 336.932,184.428 h1.27 r90; Mechanical 7 "Top Padstyle: RX22Y55D0T" at 335.027,185.38 h1.27 r90